# EAGLE board stLink-cortex_adapter (EAGLE 6.5.0)
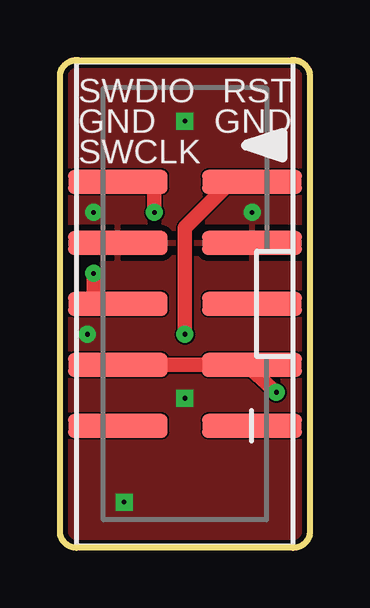
[diagram p0: board, top side]
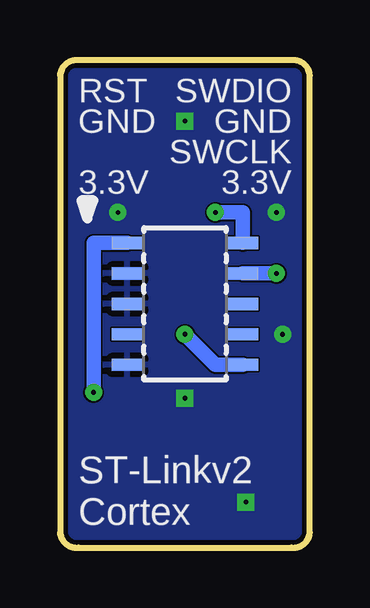
[diagram p1: board, bottom side, seen from below]

Size 10.41 x 20.33 mm. Coordinates in mm from the lower left corner, seen from the top.
Outline: 9.65,0 0.76,0 arc-90 0,0.64 0,19.69 arc-90 0.76,20.32 9.65,20.32 arc-90 10.41,19.69 10.41,0.64 arc-90 9.65,0
Copper layers (1*2+15*16): Top 0.017mm / dielectric 0.5mm / GND 0.017mm / dielectric 0.075mm / 3.3V 0.017mm / dielectric 0.5mm / Bottom 0.017mm
Design rules "PaxInstrument-T400 *": minimum track width 0.1mm, minimum drill 0.2mm, track to track 0.075mm, track to pad 0.075mm, pad to pad 0.075mm, via to via 0.075mm, smd to smd 0.075mm, copper to edge 0.2mm, drill to drill 0.2mm, minimum pad ring 12mil, minimum via ring 10mil, stop-mask expansion 0.05mm, vias tented up to drill 0.2mm, thermal gap 10mil
Net classes: 0 Digital signal: width 0.075 mm, drill 0.2 mm, clearance 0.075 mm; 1 3.3V power: width 0.075 mm, drill 0.2 mm, clearance 0.075 mm; 2 RTC battery: width 0.075 mm, drill 0.2 mm, clearance 0.075 mm; 3 5V power: width 0.075 mm, drill 0.2 mm, clearance 0.075 mm; 4 Analog signal: width 0.075 mm, drill 0.2 mm, clearance 0.075 mm; 5 Ground: width 0.075 mm, drill 0.2 mm, clearance 0.075 mm

## Footprints (pad centres in the part's own frame; a part is rotated, then mirrored left to right if it is on the bottom)
2X5-SHROUDED_SMD = smd 4.15 x 1: 1 -2.794,5.08; 2 2.794,5.08; 3 -2.794,2.54; 4 2.794,2.54; 5 -2.794,0; 6 2.794,0; 7 -2.794,-2.54; 8 2.794,-2.54; 9 -2.794,-5.08; 10 2.794,-5.08
SAMTECH_FTSH-105-01 = smd 0.508 x 1.27: 1 -2.54,-2.413; 2 -2.54,2.413; 3 -1.27,-2.413; 4 -1.27,2.413; 5 0,-2.413; 6 0,2.413; 7 1.27,-2.413; 8 1.27,2.413; 9 2.54,-2.413; 10 2.54,2.413

## Placement (x,y rotation side)
J1  [2X5-SHROUDED_SMD]  5.21,10.16 180 top
J15  Cortex Debug  [SAMTECH_FTSH-105-01]  5.21,10.16 270 bottom

## Library data of the parts
J1 J15 = SparkFun-Connectors

## Nets
3.3V: J1.3 J1.4 J15.1
GND [Ground]: J1.7 J1.8 J15.3 J15.5 J15.9
NRST: J1.9 J15.10
SWDCLK: J1.6 J15.4
SWDIO: J1.10 J15.2

## Tracks (layer width: path | path; a pad name or v marks a point on that pad's centre or on a via)
3.3V  (via drill 0.2)
  Top 0.61: J1.4 J1.3 8,7.37 v9.02,6.48
  Bottom 0.61: v9.02,6.48 9.02,12.7 J15.1
GND  (via drill 0.2)
  other vias: 2.67,1.91 5.21,17.78 8,13.97 1.4,13.97 1.14,8.89 5.21,6.23
  pour Top: 0.13,0 10.29,0 10.29,20.32 0.13,20.32
  pour Bottom: 0.13,0 10.29,0 10.29,20.32 0.13,20.32
NRST  (via drill 0.2)
  Top 0.61: J1.9 7.11,15.24 5.21,13.34 v5.21,8.89
  Bottom 0.61: v5.21,8.89 3.94,7.62 J15.10
SWDCLK  (via drill 0.2)
  Top 0.61: v1.4,11.43 1.4,10.16 J1.6
  Bottom 0.61: J15.4 v1.4,11.43
SWDIO  (via drill 0.2)
  Top 0.61: J1.10 3.94,15.24 v3.94,13.97
  Bottom 0.61: v3.94,13.97 2.79,13.97 J15.2

## Text on the board
tPlace: SWDIO | RST | GND | GND | SWCLK
bPlace: SWDIO | RST | GND | GND | SWCLK | 3.3V | 3.3V | ST-Linkv2 / Cortex
tDocu: SWDIO | RST | GND | GND | SWCLK | 3.3V | 3.3V